# EAGLE board dual_soil_probe_andrew (EAGLE 9.6.0)
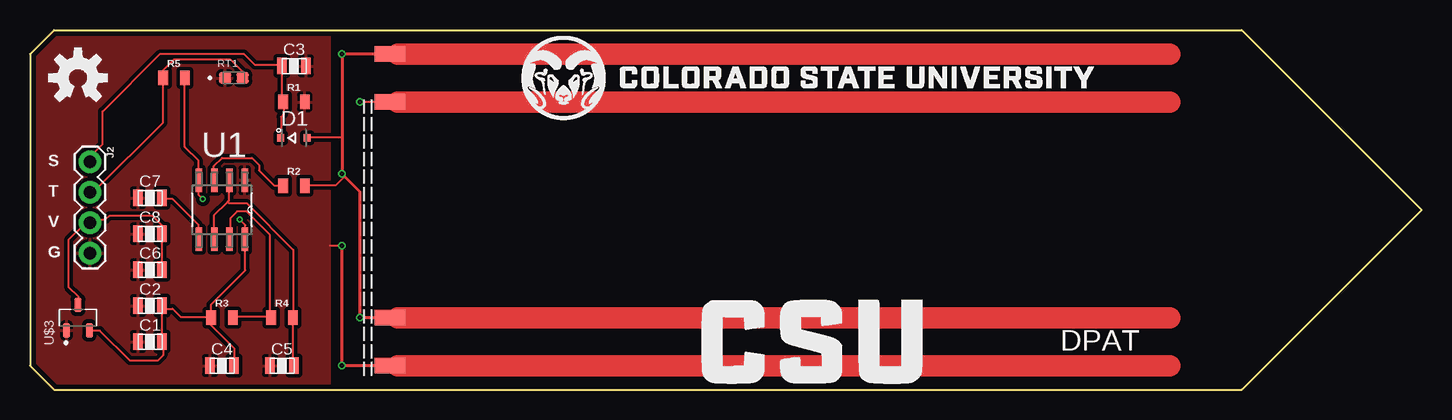
[diagram p0: board, top side]
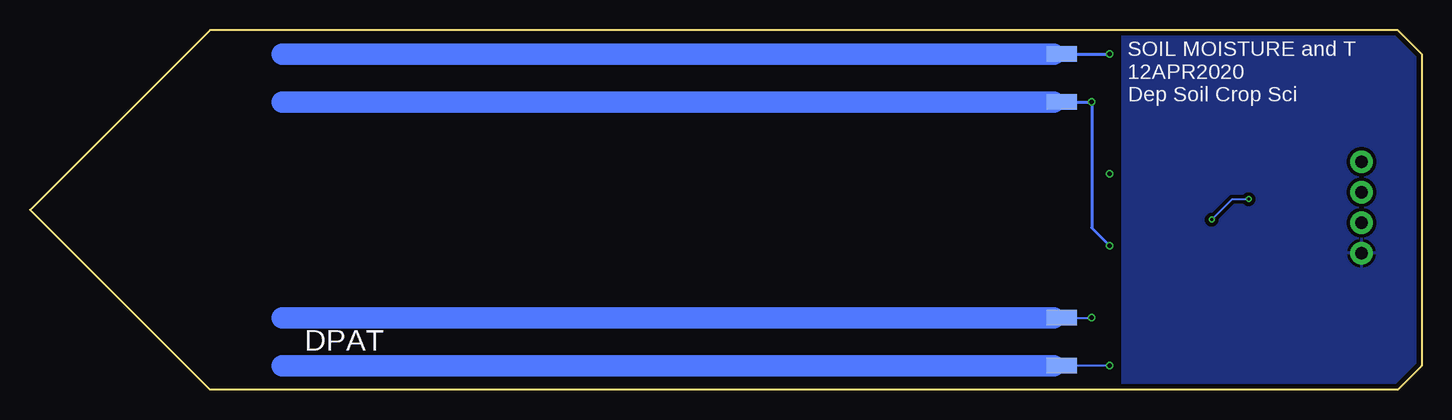
[diagram p1: board, bottom side, seen from below]

Size 116 x 30 mm. Coordinates in mm from the lower left corner, seen from the top.
Outline: 0,28 0,2 2,0 101,0 116,15 101,30 2,30 0,28
Copper layers (1*16): Top 0.035559375mm / dielectric 1.6mm / Bottom 0.035559375mm
Design rules "oshpark-2layer": minimum track width 6mil, minimum drill 10mil, track to track 6mil, track to pad 6mil, pad to pad 6mil, via to via 6mil, smd to smd 6mil, copper to edge 15mil, drill to drill 6mil, minimum pad ring 5mil, minimum via ring 5mil, stop-mask expansion 2.5mil, vias tented up to drill 0mil, thermal gap 10mil
Net classes: 0 default: clearance 0.305 mm; 1 Prob: clearance 1.499 mm

## Footprints (pad centres in the part's own frame; a part is rotated, then mirrored left to right if it is on the bottom)
PASSIVES_0805_CAP = smd 0.8 x 1.4: P$1 1,0; P$2 -1,0
SOD323 = smd 0.6 x 0.6: A 1.1,0; C -1.1,0
1X04 = drill 1.016 pad 1.88: 1 0,0; 2 2.54,0; 3 5.08,0; 4 7.62,0
0805 = smd 0.8 x 1.2: 1 -0.9,0; 2 0.9,0
THERM_NCP18XH103F03RB = smd 1 x 0.97: 1 -0.735,0; 2 0.735,0
SHORT_TOP-50 = smd 1.27 x 1.27: 1 0.635,0; 2 -0.635,0
TLC555_SOIC127P600X175-8N = smd 1.981 x 0.559: 1 -2.464,1.905; 2 -2.464,0.635; 3 -2.464,-0.635; 4 -2.464,-1.905; 5 2.464,-1.905; 6 2.464,-0.635; 7 2.464,0.635; 8 2.464,1.905
SOT95P237X112-3N = smd 1.23 x 0.59: 1 -1.06,0.95; 2 -1.06,-0.95; 3 1.06,0

## Placement (x,y rotation side)
C1  0.1uF  [PASSIVES_0805_CAP]  10,4 0 top
C2  4.7uF  [PASSIVES_0805_CAP]  10,7 0 top
C3  1uF  [PASSIVES_0805_CAP]  22,27 0 top
C4  0.1uF  [PASSIVES_0805_CAP]  16,2 0 top
C5  470pF  [PASSIVES_0805_CAP]  21,2 0 top
C6  0.1uF  [PASSIVES_0805_CAP]  10,10 0 top
C7  10nF  [PASSIVES_0805_CAP]  10,16 0 top
C8  4.7uF  [PASSIVES_0805_CAP]  10,13 0 top
D1  1N4148WS  [SOD323]  22,21 0 top
J2  [1X04]  5,19 270 top
LOGO1  OSHW-LOGOM  [OSHW-LOGO-M]  4,26 0 top
R1  1M  [0805]  22,24 0 top
R2  10K  [0805]  22,17 0 top
R3  330  [0805]  16,6 0 top
R4  1.6K  [0805]  21,6 0 top
R5  10K  [0805]  12,26 0 top
RT1  NCP18XH103F03RB  [THERM_NCP18XH103F03RB]  17,26 0 top
SA1  SHORT-VT5  [SHORT_TOP-50]  30,2 180 top
SA2  SHORT-VT5  [SHORT_TOP-50]  30,24 0 top
SA3  SHORT-VT5  [SHORT_TOP-50]  30,2 0 bottom
SA4  SHORT-VT5  [SHORT_TOP-50]  30,24 0 bottom
SC1  SHORT-VT5  [SHORT_TOP-50]  30,6 0 top
SC2  SHORT-VT5  [SHORT_TOP-50]  30,28 0 top
SC3  SHORT-VT5  [SHORT_TOP-50]  30,6 180 bottom
SC4  SHORT-VT5  [SHORT_TOP-50]  30,28 180 bottom
U1  TLC555_TLC555  [TLC555_SOIC127P600X175-8N]  16,15 270 top
U$1  CSU-SIGNATURE-LOGO7MM  [CSU-SIGNATURE-7MM]  41,22.5 0 top
U$2  [CSU-NAME-7MM]  56,0.5 0 top
U$3  MCP1700T-3002E/TT  [SOT95P237X112-3N]  4,6 90 top

## Library data of the parts
C1-C8 = AriFrutSoilSensor_16Mar2020a
D1 = 1N4148WS; AVAILABILITY: Unavailable; DESCRIPTION: Diode Standard 75V 150mA Surface Mount SOD-323F; MF: ON Semiconductor; MP: 1N4148WS; PACKAGE: S-0 Good-Ark; PRICE: None
J2 = SparkFun-Connectors; PROD_ID: CONN-09696
LOGO1 = SparkFun-Aesthetics
R1-R5 = SparkFun-Resistors
RT1 = NCP18XH103F03RB; AVAILABILITY: Unavailable; DESCRIPTION: NTC Thermistor 10k 0603 _1608 Metric_; MF: Murata; MP: NCP18XH103F03RB; PACKAGE: 0603 Murata; PRICE: None
SA1-SA4 SC1-SC4 = shorts-old; BOM: no
U1 = AriFrutSoilSensor_16Mar2020a; AVAILABILITY: Unavailable; DESCRIPTION: 555 Type, Timer/Oscillator _Single_ IC 2.1MHz 8-SOIC; MF: Texas Instruments; MP: TLC555; PACKAGE: SOIC-8 Texas Instruments; PRICE: None
U$1 U$2 = HamLab-Aesthetics
U$3 = MCP1700T-3002E_TT; AVAILABILITY: Unavailable; DESCRIPTION: Linear Voltage Regulator IC 1 Output 250mA SOT-23-3; MF: Microchip; MP: MCP1700T-3002E/TT; PACKAGE: SOT-23 Microchip; PRICE: None

## Nets
3VREG: C1.P$1 C2.P$1 C4.P$1 R3.1 R5.2 U1.4 U1.8 U$3.2
A1 [Prob]: SA1.2
A2 [Prob]: SA2.1
A3: SA3.2
A4: SA4.2
C1: SC1.1
C2: SC2.1
C3: SC3.1
C4: SC4.1
GND: C1.P$2 C2.P$2 C3.P$1 C4.P$2 C5.P$2 C6.P$2 C7.P$2 C8.P$2 J2.4 R1.2 RT1.1 SA1.1 SA2.2 SA3.1 SA4.1 U1.1 U$3.1
N$4: R2.1 U1.3
N$5: R3.2 R4.1 U1.7
N$6: D1.A R2.2 SC1.2 SC2.2 SC3.2 SC4.2
N$7: C5.P$1 R4.2 U1.2 U1.6
N$9: C7.P$1 U1.5
TEMP: J2.2 R5.1 RT1.2
VCC: C6.P$1 C8.P$1 J2.3 U$3.3
VOUT: C3.P$2 D1.C J2.1 R1.1

## Tracks (layer width: path | path; a pad name or v marks a point on that pad's centre or on a via)
3VREG  (via drill 0.25)
  Top 0.152: R5.2 12.92,25.95 12.92,20.23 14.06,19.09 14.06,17.49 U1.4 14.06,17.37 14.06,16.23 v14.4,15.89 | U$3.2 5.03,4.92 5.83,4.92 8.34,2.4 10.63,2.4 11.09,2.86 11.09,3.89 C1.P$1 10.97,4 10.97,6.97 C2.P$1 11.09,6.97 11.32,6.74 11.89,6.74 12.57,6.06 15.09,6.06 | C4.P$1 17.03,2.06 17.03,3.43 15.09,5.37 15.09,5.94 R3.1 15.09,6.06 | 15.09,6.06 15.09,7.09 17.95,9.94 17.95,12.46 U1.8 17.95,12.57 17.95,13.72 v17.49,14.17
  Bottom 0.152: v14.4,15.89 15.77,15.89 v17.49,14.17
A1
  Top 1.8: SA1.2 95,2
A2
  Top 1.8: 95,24 SA2.1
A3
  Bottom 1.8: SA3.2 95,2
A4
  Bottom 1.8: SA4.2 95,24
C1
  Top 1.8: SC1.1 95,6
C2
  Top 1.8: 95,28 SC2.1
C3
  Bottom 1.8: SC3.1 95,6
C4
  Bottom 1.8: SC4.1 95,28
GND  (via drill 0.35)
  Top 0.152: SA4.1 v27.5,24 | 25,12 25.83,12 v26,12
  Top 0.254: 25.9,12 v26,12 v26,2 SA3.1
  Bottom 0.152: v26,2 SA3.1
  Bottom 0.254: v26,12 27.5,13.5 v27.5,24 SA4.1
  pour Top: -1,32 -1,-3 25,-3 25,32
  pour Bottom: -1,37 25,37 25,-7 -1,-7
N$4
  Top 0.152: R2.1 21.03,17.03 20.34,17.03 19.09,18.29 19.09,18.75 18.52,19.32 16,19.32 15.32,18.63 15.32,17.49 U1.3
N$5
  Top 0.152: 20,6.06 16.92,6.06 R3.2 | 20,6.06 20,12.92 18.06,14.86 17.26,14.86 16.69,14.29 16.69,12.57 U1.7 | 20,6.06 R4.1
N$6  (via drill 0.35)
  Top 0.152: 26,21.03 23.2,21.03 D1.A | 26.23,17.77 25.49,17.03 22.97,17.03 R2.2
  Top 0.254: SC3.2 v27.5,6 27.5,16.5 26.23,17.77 v26,18 26,21.03 v26,28 SC4.2
  Bottom 0.152: SC3.2 v27.5,6
  Bottom 0.254: SC4.2 v26,28
N$7
  Top 0.152: C5.P$1 21.95,2.06 21.95,5.94 R4.2 21.95,6.06 21.95,11.66 18.06,15.54 16.57,15.54 16.46,15.66 | 16.46,15.66 16.57,15.77 16.57,17.37 U1.2 | 16.46,15.66 15.32,14.52 15.32,12.57 U1.6
N$9
  Top 0.152: C7.P$1 11.09,15.89 11.89,15.89 14.06,13.72 14.06,12.57 U1.5
TEMP
  Top 0.152: RT1.2 17.72,26.06 17.72,26.52 16.69,27.55 12,27.55 11.09,26.63 11.09,26.06 R5.1 11.09,25.95 11.09,22.29 5.37,16.57 5.03,16.57 J2.2
VCC
  Top 0.152: C6.P$1 10.97,10.06 10.97,12.92 C8.P$1 10.97,13.03 10.97,13.72 10.17,14.52 6.63,14.52 6.29,14.17 5.26,14.17 5.03,13.95 J2.3 4.92,13.83 4.57,13.83 3.2,12.46 3.2,8.57 4,7.77 4,7.09 U$3.3
VOUT
  Top 0.152: D1.C 20.92,21.03 20.92,22.75 21.14,22.97 21.14,23.89 R1.1 21.03,24 21.03,26.98 C3.P$2 20.92,27.09 18.75,27.09 17.83,28 10.86,28 6.06,23.2 6.06,20.46 5.03,19.43 5.03,19.09 J2.1

## Text on the board
tPlace: S / T / V / G | DPAT | ================
bPlace: SOIL MOISTURE and T / 12APR2020 / Dep Soil Crop Sci | DPAT